# Altium PCB BO MO RONG.PcbDoc
Units mil, origin at the board's own origin, x right, y up, seen from the top; angles counter-clockwise.
Board outline 2090 x 3225 mil, 2 copper layers (Top Layer, Bottom Layer); 10 components, 9 nets, 110 pads, 0 vias.
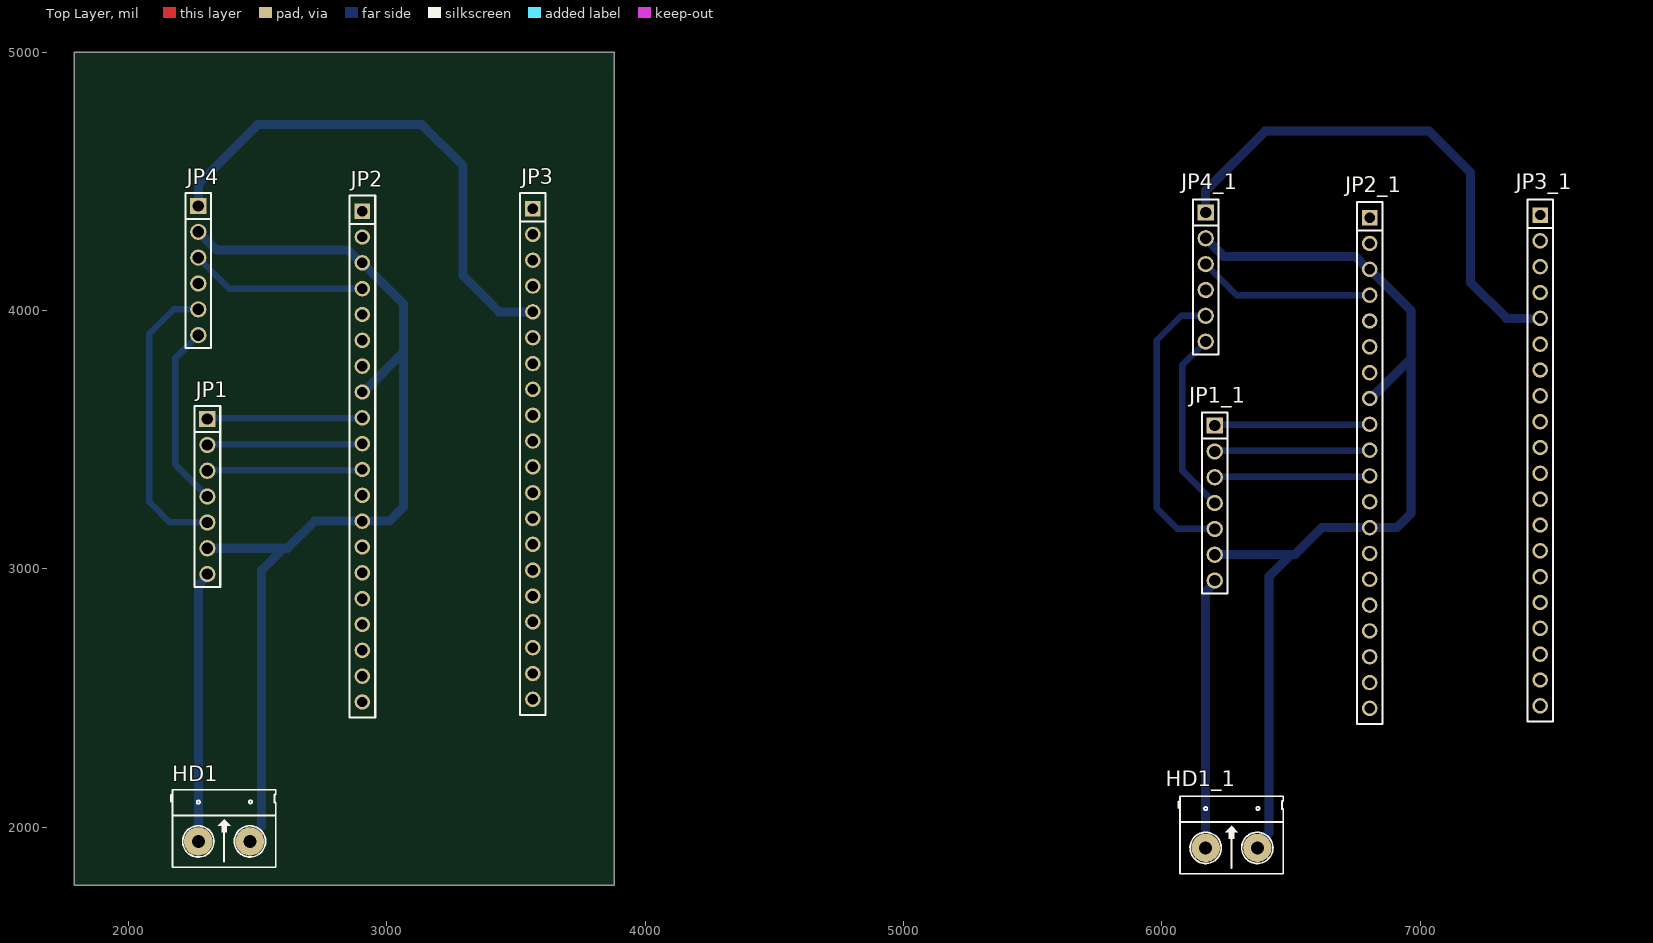
[diagram p0: Top Layer view]
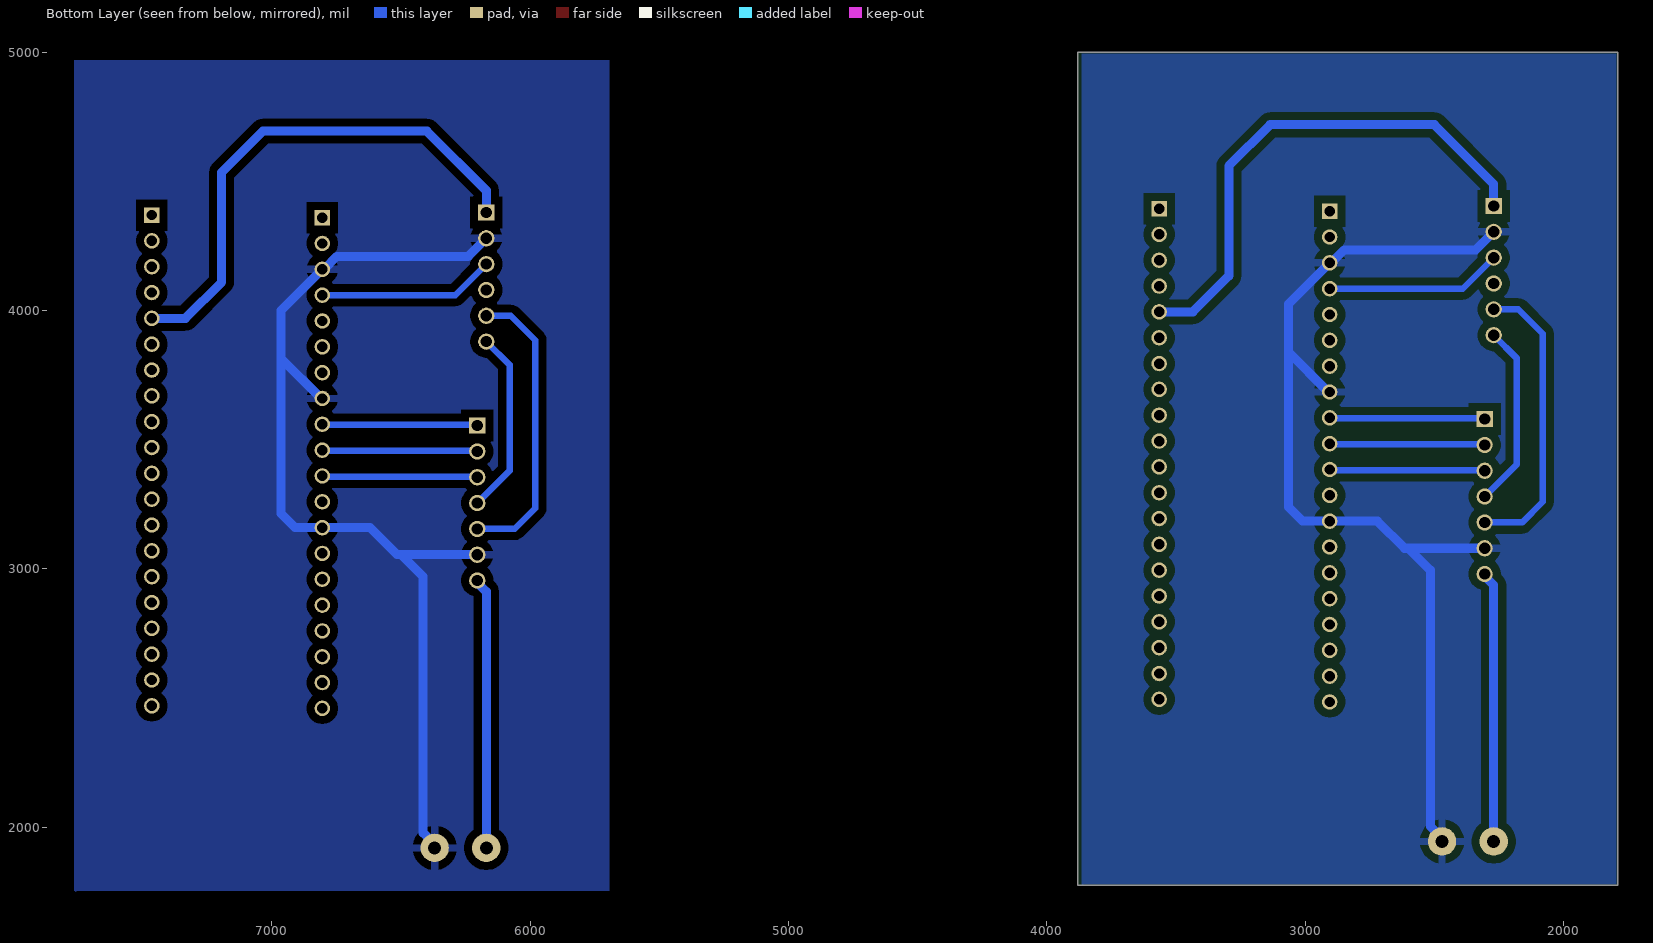
[diagram p1: Bottom Layer view, seen from below]

## Layer stack, top to bottom
Top Solder: solder mask 0.4, Solder Resist, Dk 3.5
Top Layer: signal copper 1.4
Dielectric 1: dielectric 12.6, FR-4, Dk 4.8
Bottom Layer: signal copper 1.4
Bottom Solder: solder mask 0.4, Solder Resist, Dk 3.5

## Board outline
1790,1775 3880,1775 3880,5000 1790,5000

## Design rules (kind name [scope] priority, off if disabled: settings)
Clearance Clearance_9 [InNamedPolygon('GND_L02_P000')] p1: gap=30 ignorepadtopadclearanceinfootprint=FALSE
Clearance Clearance_8 [InNamedPolygon('GND_L02_P000')] p2: gap=25 ignorepadtopadclearanceinfootprint=FALSE
Clearance Clearance_7 [InNamedPolygon('GND_L02_P000')] p3: gap=25 ignorepadtopadclearanceinfootprint=FALSE
Clearance Clearance_6 [InNamedPolygon('GND_L02_P000')] p4: gap=25 ignorepadtopadclearanceinfootprint=FALSE
Clearance Clearance_5 [InNamedPolygon('GND_L02_P000')] p5: gap=25 ignorepadtopadclearanceinfootprint=FALSE
Clearance Clearance_4 [InNamedPolygon('GND_L02_P003')] p6: gap=25 ignorepadtopadclearanceinfootprint=FALSE
Clearance Clearance_3 [InNamedPolygon('GND_L02_P003')] p7: gap=20 ignorepadtopadclearanceinfootprint=FALSE
Clearance Clearance_2 [InNamedPolygon('GND_L02_P003')] p8: gap=787.4 ignorepadtopadclearanceinfootprint=FALSE
Clearance Clearance_1 [InNamedPolygon('GND_L02_P000')] p9: gap=25 ignorepadtopadclearanceinfootprint=FALSE
Clearance [All] p10: gap=20 ignorepadtopadclearanceinfootprint=FALSE
PolygonConnect PolygonConnect_6 [All vs IsNamedPolygon('GND_L02_P000')] p1: thpad.connectstyle=Relief thpad.reliefconductorwidth=30 thpad.reliefentries=4 thpad.polygonreliefangle="90 Angle" thpad.airgapwidth=30 smdpad.connectstyle=Relief smdpad.reliefconductorwidth=10 smdpad.reliefentries=4 smdpad.polygonreliefangle="90 Angle" smdpad.airgapwidth=10 via.connectstyle=Relief via.reliefconductorwidth=30 via.reliefentries=4 via.polygonreliefangle="90 Angle" via.airgapwidth=30
PolygonConnect PolygonConnect_5 [All vs IsNamedPolygon('GND_L02_P000')] p2: thpad.connectstyle=Relief thpad.reliefconductorwidth=25 thpad.reliefentries=4 thpad.polygonreliefangle="90 Angle" thpad.airgapwidth=25 smdpad.connectstyle=Relief smdpad.reliefconductorwidth=10 smdpad.reliefentries=4 smdpad.polygonreliefangle="90 Angle" smdpad.airgapwidth=10 via.connectstyle=Relief via.reliefconductorwidth=25 via.reliefentries=4 via.polygonreliefangle="90 Angle" via.airgapwidth=25
PolygonConnect PolygonConnect_4 [All vs IsNamedPolygon('GND_L02_P000')] p3: thpad.connectstyle=Relief thpad.reliefconductorwidth=25 thpad.reliefentries=4 thpad.polygonreliefangle="90 Angle" thpad.airgapwidth=25 smdpad.connectstyle=Relief smdpad.reliefconductorwidth=10 smdpad.reliefentries=4 smdpad.polygonreliefangle="90 Angle" smdpad.airgapwidth=10 via.connectstyle=Relief via.reliefconductorwidth=25 via.reliefentries=4 via.polygonreliefangle="90 Angle" via.airgapwidth=25
PolygonConnect PolygonConnect_3 [All vs IsNamedPolygon('GND_L02_P003')] p4: thpad.connectstyle=Relief thpad.reliefconductorwidth=25 thpad.reliefentries=4 thpad.polygonreliefangle="90 Angle" thpad.airgapwidth=25 smdpad.connectstyle=Relief smdpad.reliefconductorwidth=10 smdpad.reliefentries=4 smdpad.polygonreliefangle="90 Angle" smdpad.airgapwidth=10 via.connectstyle=Relief via.reliefconductorwidth=25 via.reliefentries=4 via.polygonreliefangle="90 Angle" via.airgapwidth=25
PolygonConnect PolygonConnect_2 [All vs IsNamedPolygon('GND_L02_P003')] p5: thpad.connectstyle=Relief thpad.reliefconductorwidth=25 thpad.reliefentries=4 thpad.polygonreliefangle="90 Angle" thpad.airgapwidth=25 smdpad.connectstyle=Relief smdpad.reliefconductorwidth=10 smdpad.reliefentries=4 smdpad.polygonreliefangle="90 Angle" smdpad.airgapwidth=10 via.connectstyle=Relief via.reliefconductorwidth=25 via.reliefentries=4 via.polygonreliefangle="90 Angle" via.airgapwidth=25
PolygonConnect PolygonConnect_1 [All vs IsNamedPolygon('GND_L02_P000')] p6: thpad.connectstyle=Relief thpad.reliefconductorwidth=25 thpad.reliefentries=4 thpad.polygonreliefangle="90 Angle" thpad.airgapwidth=25 smdpad.connectstyle=Relief smdpad.reliefconductorwidth=10 smdpad.reliefentries=4 smdpad.polygonreliefangle="90 Angle" smdpad.airgapwidth=10 via.connectstyle=Relief via.reliefconductorwidth=25 via.reliefentries=4 via.polygonreliefangle="90 Angle" via.airgapwidth=25
PolygonConnect [All] p7: connectstyle=Relief reliefconductorwidth=10 reliefentries=4 polygonreliefangle="90 Angle" airgapwidth=10
RoutingVias [All] p1: holewidth=28 width=50 viastyle="Through Hole" minholewidth=28 minwidth=50 maxholewidth=28 maxwidth=50
SolderMaskExpansion [All] p1: expansion=4 istentingtop=FALSE
Width [All] p1: maxlimit=35 minlimit=10 preferedwidth=25
30 further rules are at their usual default settings.

## Classes and differential pairs
component class BTLDLMT: HD1 JP1 JP2 JP3 JP4

## Components (designator, comment, footprint, x,y, rotation, side; value= is the part's Value field where it differs from the comment)
HD1 "Header 2" HED2 2270,1945 r0 top
HD1_1 "Header 2" HED2 6170,1920 r0 top (schematic designator HD1)
JP1 "JP 1x7 2.54" "JP 1x7 DT" 2305,3580 r270 top
JP1_1 "JP 1x7 2.54" "JP 1x7 DT" 6205,3555 r270 top (schematic designator JP1)
JP2 "JP 1x20 2.54" "JP 1x20 CT" 2905,4385 r270 top
JP2_1 "JP 1x20 2.54" "JP 1x20 CT" 6805,4360 r270 top (schematic designator JP2)
JP3 "JP 1x20 2.54" "JP 1x20 CT" 3565,4395 r270 top
JP3_1 "JP 1x20 2.54" "JP 1x20 CT" 7465,4370 r270 top (schematic designator JP3)
JP4 "JP 1x6 2.54" "JP 1x6 DT" 2270,4405 r270 top
JP4_1 "JP 1x6 2.54" "JP 1x6 DT" 6170,4380 r270 top (schematic designator JP4)

## Footprints (in the part's own frame and the unit in brackets; to place one, negate y for a bottom-side part, rotate by r counter-clockwise, add the part's x,y. Pads: shape width x height; smd on the part's side, far side on the other; paste and mask are expansions set on the pad)
HED2 [mil] "Header 2, 2 pin, hight 300mil, Pin to Pin 200, Colour Green"
  round 110 hole 50: 1(0,0) 2(200,0)
  silkscreen extent -106,-100 300,200, body extent -92,-140 302,155, height 394
"JP 1x6 DT" [mm] "6 pins, 1 row, straight, gold plating"
  rect 1.6x1.6 hole 1.1: 1(0,0)
  round 1.6 hole 1.1: 2(2.54,0) 3(5.08,0) 4(7.62,0) 5(10.16,0) 6(12.7,0)
  silkscreen extent -1.27,-1.27 13.97,1.27, body extent -1.27,-1.27 13.97,1.27, height 8.54
"JP 1x7 DT" [mm] "7 pins, 1 row, straight, gold plating"
  rect 1.6x1.6 hole 1.1: 1(0,0)
  round 1.6 hole 1.1: 2(2.54,0) 3(5.08,0) 4(7.62,0) 5(10.16,0) 6(12.7,0) 7(15.24,0)
  silkscreen extent -1.27,-1.27 16.51,1.27, body extent -1.27,-1.27 16.51,1.27, height 8.54
"JP 1x20 CT" [mm] "20 row, straight, gold plating"
  rect 1.52x1.52 hole 1.02: 1(0,0)
  round 1.52 hole 1.02: 2(2.54,0) 3(5.08,0) 4(7.62,0) 5(10.16,0) 6(12.7,0) 7(15.24,0) 8(17.78,0) 9(20.32,0) 10(22.86,0) 11(25.4,0) 12(27.94,0) 13(30.48,0) 14(33.02,0) 15(35.56,0) 16(38.1,0) 17(40.64,0) 18(43.18,0) 19(45.72,0) 20(48.26,0)
  silkscreen extent -1.52,-1.27 49.78,1.27, body extent -1.52,-1.25 49.78,1.25, height 8.51

## Part data
HD1 HD1_1: library part Hed2, "Header 2 (Green)"
JP1 JP1_1: library part "JP 1x7 2.54 Duc Thang", "Cắm", Chung_Loai=Cắm, Don_Vi=Con, Ma_Hang=MH000903, Ten_Linh_Kien="Jump Đơn Đực 2.54MM 1x40P Thẳng 11MM"
JP2 JP2_1 JP3 JP3_1: library part "JP 1x20 2.54 Cai Thang", "Cắm", Chung_Loai=Cắm, Don_Vi=Con, Ma_Hang=MH004006, Ten_Linh_Kien="Jump Đơn Cái 2.54MM 1x20P Thẳng"
JP4 JP4_1: library part "JP 1x6 2.54 Duc Thang", "Cắm", Chung_Loai=Cắm, Don_Vi=Con, Ma_Hang=MH000903, Ten_Linh_Kien="Jump Đơn Đực 2.54MM 1x40P Thẳng 11MM"

## Nets (pads, with @x,y where several pads share a name; then routed paths per layer and width w, separated by ;. In a path a pad name is that pad's centre, name@x,y a point inside that pad or via, vN(x,y) a via of type N, cw(c..) or ccw(c..) an arc to the next point about the centre after c; other vN are vias at no path point)
3.3V: JP3.5 JP4.1 | length 2024.5
  Bottom Layer w35: JP4.1 2270,4490 2500,4720 3135,4720 3295,4560 3295,4135 3435,3995 JP3.5
ENA: JP1.3 JP2.11 | length 602.1
  Bottom Layer w25: JP1.3 2307.5,3382.5 2902.5,3382.5 JP2.11
ENC: JP2.4 JP4.3 | length 691.8
  Bottom Layer w25: JP4.3 2390,4085 JP2.4 JP2.4@2900,4090
GND: HD1.2 JP1.6 JP2.3 JP2.8 JP2.13 JP4.2 | length 3935.3
  Bottom Layer w35: JP4.2 2340,4235 2848.28,4235 2898.28,4185 JP2.3 3065,4025 3065,3840 ; JP1.6 2615,3080 2720,3185 JP2.13 3010,3185 3065,3240 3065,3840 ; HD1.2 2470,1958 2515,2003 2515,2995 2600,3080 ; JP2.8 2910,3685 3065,3840
IN1: JP1.1 JP2.9 | length 602.1
  Bottom Layer w25: JP1.1 2307.5,3582.5 2902.5,3582.5 JP2.9
IN2: JP1.2 JP2.10 | length 602.1
  Bottom Layer w25: JP1.2 2307.5,3482.5 2902.5,3482.5 JP2.10
OUT1: JP1.5 JP4.5 | length 1137.5
  Bottom Layer w25: JP4.5 2175,4005 2080,3910 2080,3260 2160,3180 JP1.5
OUT2: JP1.4 JP4.6 | length 714.1
  Bottom Layer w25: JP4.6 2180,3815 2180,3405 JP1.4
VCC: HD1.1 JP1.7 | length 1049.5
  Bottom Layer w35: HD1.1 2270,2937.43 2305,2972.43 JP1.7
pads on no net: HD1_1.1 HD1_1.2 JP1_1.1 JP1_1.2 JP1_1.3 JP1_1.4 JP1_1.5 JP1_1.6 JP1_1.7 JP2.1 JP2.2 JP2.5 JP2.6 JP2.7 JP2.12 JP2.14 JP2.15 JP2.16 JP2.17 JP2.18 JP2.19 JP2.20 JP2_1.1 JP2_1.2 JP2_1.3 JP2_1.4 JP2_1.5 JP2_1.6 JP2_1.7 JP2_1.8 JP2_1.9 JP2_1.10 JP2_1.11 JP2_1.12 JP2_1.13 JP2_1.14 JP2_1.15 JP2_1.16 JP2_1.17 JP2_1.18 JP2_1.19 JP2_1.20 JP3.1 JP3.2 JP3.3 JP3.4 JP3.6 JP3.7 JP3.8 JP3.9 JP3.10 JP3.11 JP3.12 JP3.13 JP3.14 JP3.15 JP3.16 JP3.17 JP3.18 JP3.19 JP3.20 JP3_1.1 JP3_1.2 JP3_1.3 JP3_1.4 JP3_1.5 JP3_1.6 JP3_1.7 JP3_1.8 JP3_1.9 JP3_1.10 JP3_1.11 JP3_1.12 JP3_1.13 JP3_1.14 JP3_1.15 JP3_1.16 JP3_1.17 JP3_1.18 JP3_1.19 JP3_1.20 JP4.4 JP4_1.1 JP4_1.2 JP4_1.3 JP4_1.4 JP4_1.5 JP4_1.6
copper on no net: | length 11358.9
  Bottom Layer w25: 6170,3880 6080,3790 6080,3380 6205,3255 ; 6170,3980 6075,3980 5980,3885 5980,3235 6060,3155 6205,3155 ; 6170,4180 6290,4060 6805,4060 6800,4065 ; 6205,3355 6207.5,3357.5 6802.5,3357.5 6805,3360 ; 6205,3455 6207.5,3457.5 6802.5,3457.5 6805,3460 ; 6205,3555 6207.5,3557.5 6802.5,3557.5 6805,3560
  Bottom Layer w35: 6170,1920 6170,2912.43 6205,2947.43 6205,2955 ; 6170,4280 6240,4210 6748.28,4210 6798.28,4160 6805,4160 6965,4000 6965,3815 ; 6170,4380 6170,4465 6400,4695 7035,4695 7195,4535 7195,4110 7335,3970 7465,3970 ; 6205,3055 6515,3055 6620,3160 6805,3160 6910,3160 6965,3215 6965,3815 ; 6370,1920 6370,1933 6415,1978 6415,2970 6500,3055 ; 6805,3660 6810,3660 6965,3815

## Polygon pours and split planes (outlines as drawn)
no net on Bottom Layer "NONET_L02_P003" (solid, remove dead copper, pour order 3): 5695,4970 7765,4970 7765,1755 7760,1750 7755,1755 5695,1755
GND on Bottom Layer "GND_L02_P000" (solid, remove dead copper, pour order 0): 1795,4995 3865,4995 3865,1780 3860,1775 3855,1780 1795,1780